# EAGLE board mod69 (EAGLE 9.6.1)
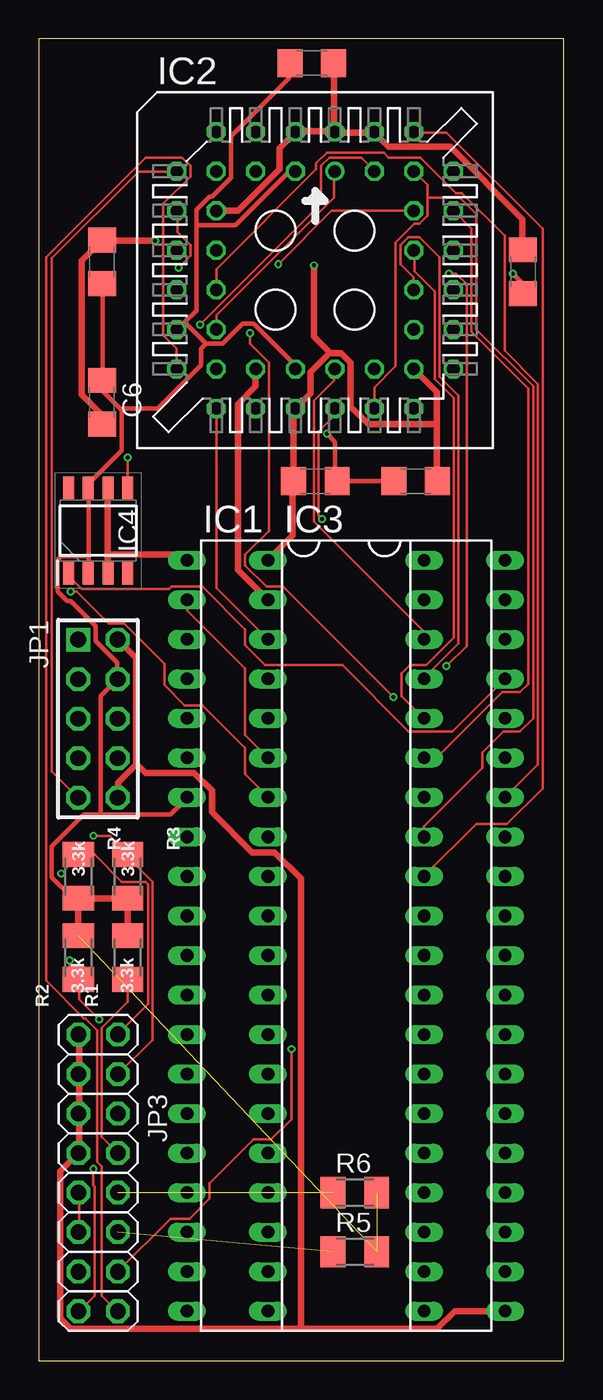
[diagram p0: board, top side]
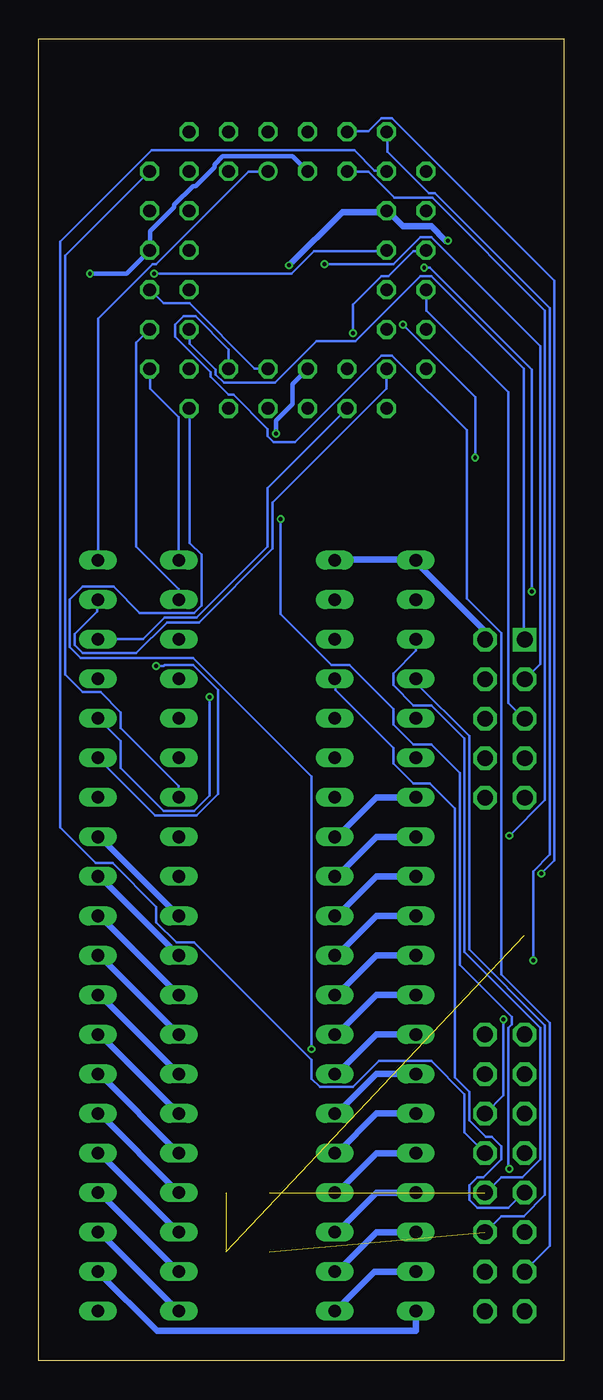
[diagram p1: board, bottom side, seen from below]

Size 33.76 x 84.94 mm. Coordinates in mm from the lower left corner, seen from the top.
Outline: 0,0 33.76,0 33.76,84.94 0,84.94 0,0
Copper layers (1*16): Top 0.035559375mm / dielectric 1.6mm / Bottom 0.035559375mm
Design rules "oshpark-2layer": minimum track width 6mil, minimum drill 10mil, track to track 6mil, track to pad 6mil, pad to pad 6mil, via to via 6mil, smd to smd 6mil, copper to edge 15mil, drill to drill 6mil, minimum pad ring 5mil, minimum via ring 5mil, stop-mask expansion 2.5mil, vias tented up to drill 0mil, thermal gap 10mil
Net classes: 0 default: width 0.152 mm, clearance 0.152 mm; 1 PWR: width 0.305 mm, clearance 0.152 mm; 2 GND: width 0.406 mm, clearance 0.152 mm

## Footprints (pad centres in the part's own frame; a part is rotated, then mirrored left to right if it is on the bottom)
C1206 = smd 1.6 x 1.8: 1 -1.4,0; 2 1.4,0
DIL40 = drill 0.813 long: 1 -24.13,-7.62; 2 -21.59,-7.62; 3 -19.05,-7.62; 4 -16.51,-7.62; 5 -13.97,-7.62; 6 -11.43,-7.62; 7 -8.89,-7.62; 8 -6.35,-7.62; 9 -3.81,-7.62; 10 -1.27,-7.62; 11 1.27,-7.62; 12 3.81,-7.62; 13 6.35,-7.62; 14 8.89,-7.62; 15 11.43,-7.62; 16 13.97,-7.62; 17 16.51,-7.62; 18 19.05,-7.62; 19 21.59,-7.62; 20 24.13,-7.62; 21 24.13,7.62; 22 21.59,7.62; 23 19.05,7.62; 24 16.51,7.62; 25 13.97,7.62; 26 11.43,7.62; 27 8.89,7.62; 28 6.35,7.62; 29 3.81,7.62; 30 1.27,7.62; 31 -1.27,7.62; 32 -3.81,7.62; 33 -6.35,7.62; 34 -8.89,7.62; 35 -11.43,7.62; 36 -13.97,7.62; 37 -16.51,7.62; 38 -19.05,7.62; 39 -21.59,7.62; 40 -24.13,7.62
PLCC-S44 = drill 0.813: 1 1.27,6.35 | drill 0.813 octagon: 2 -1.27,8.89; 3 -1.27,6.35; 4 -3.81,8.89; 5 -3.81,6.35; 6 -6.35,8.89; 7 -8.89,6.35; 8 -6.35,6.35; 9 -8.89,3.81; 10 -6.35,3.81; 11 -8.89,1.27; 12 -6.35,1.27; 13 -8.89,-1.27; 14 -6.35,-1.27; 15 -8.89,-3.81; 16 -6.35,-3.81; 17 -8.89,-6.35; 18 -6.35,-8.89; 19 -6.35,-6.35; 20 -3.81,-8.89; 21 -3.81,-6.35; 22 -1.27,-8.89; 23 -1.27,-6.35; 24 1.27,-8.89; 25 1.27,-6.35; 26 3.81,-8.89; 27 3.81,-6.35; 28 6.35,-8.89; 29 8.89,-6.35; 30 6.35,-6.35; 31 8.89,-3.81; 32 6.35,-3.81; 33 8.89,-1.27; 34 6.35,-1.27; 35 8.89,1.27; 36 6.35,1.27; 37 8.89,3.81; 38 6.35,3.81; 39 8.89,6.35; 40 6.35,8.89; 41 6.35,6.35; 42 3.81,8.89; 43 3.81,6.35; 44 1.27,8.89
SOIC127P600X175-8N = smd 1.525 x 0.7: 1 -2.712,1.905; 2 -2.712,0.635; 3 -2.712,-0.635; 4 -2.712,-1.905; 5 2.712,-1.905; 6 2.712,-0.635; 7 2.712,0.635; 8 2.712,1.905
ALTERA-JTAG-10 = drill 1.016 square: 1 -5.08,-1.27 | drill 1.016 octagon: 2 -5.08,1.27; 3 -2.54,-1.27; 4 -2.54,1.27; 5 0,-1.27; 6 0,1.27; 7 2.54,-1.27; 8 2.54,1.27; 9 5.08,-1.27; 10 5.08,1.27
2X08 = drill 1.016 octagon: 1 -8.89,-1.27; 2 -8.89,1.27; 3 -6.35,-1.27; 4 -6.35,1.27; 5 -3.81,-1.27; 6 -3.81,1.27; 7 -1.27,-1.27; 8 -1.27,1.27; 9 1.27,-1.27; 10 1.27,1.27; 11 3.81,-1.27; 12 3.81,1.27; 13 6.35,-1.27; 14 6.35,1.27; 15 8.89,-1.27; 16 8.89,1.27
M1206 = smd 1.6 x 2: 1 -1.4,0; 2 1.4,0

## Placement (x,y rotation side)
C1  0.1µf  [C1206]  4.06,70.61 90 top
C2  0.1µf  [C1206]  31.12,69.98 90 top
C3  0.1µf  [C1206]  17.78,56.52 180 top
C4  0.1µf  [C1206]  17.55,83.39 0 top
C5  0.1µf  [C1206]  24.23,56.52 0 top
C6  0.1µf  [C1206]  4.06,61.59 270 top
IC1  [DIL40]  17.15,27.3 270 top
IC2  EPM7064S44  [PLCC-S44]  17.75,70.08 0 top
IC3  [DIL40]  22.35,27.3 270 top
IC4  NB3N502DG  [SOIC127P600X175-8N]  3.81,53.34 90 top
JP1  ALTERA-JTAG-10  [ALTERA-JTAG-10]  3.8,41.25 270 top
JP3  [2X08]  3.81,12.06 270 top
R1  3.3k  [M1206]  5.71,25.91 90 top
R2  3.3k  [M1206]  2.54,25.91 90 top
R3  3.3k  [M1206]  5.71,31.12 270 top
R4  3.3k  [M1206]  2.54,31.12 270 top
R5  10k  [M1206]  20.32,6.99 0 top
R6  10k  [M1206]  20.32,10.79 0 top

## Library data of the parts
C1-C6 = rcl; SPICEPREFIX: C
IC1 = micro-motorola; MF: NTE ELECTRONICS; MPN: NTE6809E; OC_FARNELL: unknown; OC_NEWARK: 31C5318
IC2 = altera; MPN: EPM7064SLC44-10N; OC_FARNELL: 1549449; OC_NEWARK: 51R0526
IC3 = ic-package
IC4 = custom-chips; ALLIED_NUMBER: 70347799; ALLIED_PRICE-STOCK: http://www.alliedelec.com/on-semiconductor-nb3n502dg/70347799/; HEIGHT: 1.75mm; MANUFACTURER_NAME: ON Semiconductor; MANUFACTURER_PART_NUMBER: NB3N502DG; MOUSER_PART_NUMBER: 863-NB3N502DG; MOUSER_PRICE-STOCK: https://www.mouser.com/Search/Refine.aspx?Keyword=863-NB3N502DG; RS_PART_NUMBER: 7876920P; RS_PRICE-STOCK: http://uk.rs-online.com/web/p/products/7876920P
JP1 = custom-chips
JP3 = pinhead
R1-R6 = rcl; SPICEPREFIX: R

## Nets
5IRQ: IC3.4 JP3.9 JP3.11
5PHI0: IC3.37 IC4.1
5PHI1: IC2.18 IC3.3
5PHI2: IC2.19 IC3.39
5RDY [GND]: IC2.21 IC3.2
5RES: IC2.1 IC2.16 IC3.40
5RW: IC2.14 IC3.34
5SO: IC2.20 IC3.38
5SYNC: IC2.9 IC3.7
9AVMA: IC1.36 IC2.36
9BUSY: IC1.33 IC2.26 IC2.41
9E: IC1.34 IC2.39
9FIRQ: IC1.4 JP3.12 R5.1
9HALT: IC1.40 IC2.29
9IRQ: IC1.3 JP3.10 R6.1
9LIC: IC1.38 IC2.25 IC2.33
9NMI: IC1.2 IC3.6
9Q: IC1.35 IC2.37
9RESET: IC1.37 IC2.34
9RW: IC1.32 IC2.40
9TSC: IC1.39 IC2.31
A0: IC1.8 IC3.9
A1: IC1.9 IC3.10
A2: IC1.10 IC3.11
A3: IC1.11 IC3.12
A4: IC1.12 IC3.13
A5: IC1.13 IC3.14
A6: IC1.14 IC3.15
A7: IC1.15 IC3.16
A8: IC1.16 IC3.17
A9: IC1.17 IC3.18
A10: IC1.18 IC3.19
A11: IC1.19 IC3.20
A12: IC1.20 IC3.22
A13: IC1.21 IC3.23
A14: IC1.22 IC3.24
A15: IC1.23 IC3.25
C0: IC2.8 JP3.8 R1.1
C1: IC2.6 JP3.6 R2.1
C2: IC2.5 JP3.4 R3.1
C3: IC2.4 JP3.2 R4.1
CLOCK: IC2.43 IC4.5
D0: IC1.31 IC3.33
D1: IC1.30 IC3.32
D2: IC1.29 IC3.31
D3: IC1.28 IC3.30
D4: IC1.27 IC3.29
D5: IC1.26 IC3.28
D6: IC1.25 IC3.27
D7: IC1.24 IC3.26
GND [GND]: C1.2 C2.2 C3.2 C4.2 C5.2 C6.2 IC1.1 IC2.2 IC2.10 IC2.22 IC2.30 IC2.42 IC2.44 IC3.1 IC3.21 IC4.3 IC4.6 JP1.2 JP1.10 JP3.1 JP3.3 JP3.5 JP3.7
N$1: IC2.27 JP3.13
N$2: IC2.28 JP3.14
N$3: IC2.24 JP3.15
N$4: IC2.17 JP3.16
SHLT: IC2.12 IC3.35
SRW: IC2.11 IC3.36
TCK: IC2.32 JP1.1
TDI: IC2.7 JP1.9
TDO: IC2.38 JP1.3
TMS: IC2.13 JP1.5
VCC [PWR]: C1.1 C2.1 C3.1 C4.1 C5.1 C6.1 IC1.7 IC2.3 IC2.15 IC2.23 IC2.35 IC3.8 IC4.2 IC4.7 JP1.4 R1.2 R2.2 R3.2 R4.2 R5.2 R6.2

## Tracks (layer width: path | path; a pad name or v marks a point on that pad's centre or on a via)
5IRQ
  Top 0.152: JP3.11 2.59,8.28 2.59,10.79 JP3.9
  Bottom 0.152: IC3.4 14.71,43.79 14.71,43.1 10.97,39.37 10.97,38.38 9.68,37.08 8.61,37.08 7.01,35.48 7.01,18.19 6.1,17.27 6.1,15.44 5.03,14.38 4.65,14.38 4.04,13.77 4.04,12.93 5.18,11.79 5.56,11.79 6.1,11.25 6.1,10.34 5.56,9.8 3.58,9.8 2.59,10.79 JP3.9
5PHI0
  Top 0.152: IC4.1 1.9,50.42 2.74,49.58 8.38,49.58 8.53,49.73 10.52,49.73 13.26,46.99 13.26,46 14.55,44.7 19.51,44.7 23.77,40.44 26.59,40.44 IC3.37
5PHI1
  Top 0.152: IC3.3 11.43,49.66 11.43,61.16 IC2.18
5PHI2
  Bottom 0.152: IC3.39 30.02,48.9 30.02,48.13 31.47,46.69 31.47,46 30.94,45.47 27.51,45.47 25.53,47.45 23.47,47.45 18.74,52.17 18.74,55.14 11.43,62.46 11.43,63.68 IC2.19
5RDY
  Top 0.406: IC2.21 13.94,62.61 12.8,61.47 12.8,50.8 14.71,48.9 IC3.2
5RES
  Top 0.152: IC2.16 11.43,66.27 11.43,67.18 18.97,74.73 18.97,76.4 IC2.1
  Bottom 0.152: IC3.40 29.95,51.49 29.95,66.95 26.44,70.46 26.21,70.46 20.27,76.4 19.05,76.4 IC2.1
5RW
  Top 0.152: IC3.34 32.08,38.3 32.08,62.76 29.95,64.9 29.95,72.29 27.2,75.03 26.82,75.03 24.54,77.32 22.48,77.32 22.17,77.62 18.52,77.62 17.83,76.94 17.83,76.56 11.43,70.16 11.43,68.86 IC2.14
5SO
  Bottom 0.152: IC3.38 29.95,46.38 27.05,46.38 25.68,47.75 23.62,47.75 19.05,52.32 19.05,56.06 13.94,61.16 IC2.20
5SYNC  (via drill 0.25)
  Top 0.152: v8.99,70.23 9.75,70.99 9.75,71.68 8.92,72.52 8.92,73.89 IC2.9 | v2.06,49.43 2.44,49.43 4.5,47.37 5.49,47.37 8.08,44.78 8.08,43.41 9.37,42.11 10.52,42.11 13.26,39.37 13.26,37.69 14.71,36.25 IC3.7
  Bottom 0.152: v8.99,70.23 8.61,70.23 2.06,63.68 v2.06,49.43
9AVMA
  Top 0.152: IC1.36 23.32,42.72 23.32,44.17 23.85,44.7 24.92,44.7 26.67,46.46 26.67,61.85 25.45,63.07 25.45,68.71 24.16,70 24.16,71.3 IC2.36
9BUSY
  Top 0.152: IC2.26 21.56,62.53 22.94,63.91 22.94,71.83 24.16,73.05 24.46,73.05 24.99,73.58 24.99,74.73 | 24.99,74.73 24.99,75.56 24.16,76.4 IC2.41 | IC1.33 24.77,34.34 28.5,38.08 28.5,39.07 29.87,40.44 30.94,40.44 31.77,41.28 31.77,62.61 28.12,66.27 28.12,73.66 27.05,74.73 24.99,74.73
9E
  Bottom 0.152: IC1.34 24.77,36.93 28.5,40.66 28.5,41.66 29.79,42.95 30.94,42.95 32.08,44.09 32.08,70.99 IC2.39
9FIRQ  (1 unrouted)
  Bottom 0.152: IC1.4 9.53,43.56 6.1,40.13 6.1,26.42 1.22,21.54 1.22,10.64 2.59,9.27 4.04,9.27 5.03,8.28 JP3.12
9HALT
  Bottom 0.152: IC1.40 24.77,60.63 26.59,62.46 26.59,63.68 IC2.29
9IRQ  (1 unrouted)
  Bottom 0.152: IC1.3 9.53,45.62 10.97,44.17 10.97,43.41 9.68,42.11 8.53,42.11 6.4,39.98 6.4,26.26 1.52,21.39 1.52,12.93 2.67,11.79 4.04,11.79 5.03,10.79 JP3.10
9LIC
  Top 0.152: IC1.38 24.77,46.84 17.68,53.92 17.68,61.7 18.97,62.99 18.97,63.68 IC2.25
  Bottom 0.152: IC2.25 19.05,63.75 19.89,63.75 24.08,67.95 25.76,67.95 26.59,68.78 IC2.33
9NMI
  Top 0.152: IC1.2 9.53,48.21 13.26,44.48 13.26,40.21 IC3.6
9Q
  Top 0.152: IC1.35 24.77,38.76 25.6,38.76 29.79,42.95 30.94,42.95 31.47,43.48 31.47,62.46 27.81,66.12 27.81,72.75 26.67,73.89 IC2.37
9RESET
  Top 0.152: IC2.34 24.08,68.86 24.08,69.62 23.24,70.46 23.24,71.68 23.77,72.21 24.46,72.21 25.76,70.92 25.76,63.22 26.98,62 26.98,46.08 24.77,43.87 IC1.37
9RW
  Top 0.152: IC2.40 24.16,78.92 26.21,78.92 32.38,72.75 32.38,36.78 30.1,34.49 28.12,34.49 24.77,31.14 IC1.32
9TSC
  Bottom 0.152: IC1.39 24.77,49.58 27.51,52.32 27.51,65.43 26.67,66.27 IC2.31
A0
  Bottom 0.406: IC3.9 14.6,31.12 12.06,33.66 IC1.8
A1
  Bottom 0.406: IC3.10 14.6,28.58 12.06,31.12 IC1.9
A2
  Bottom 0.406: IC3.11 14.6,26.04 12.06,28.58 IC1.10
A3
  Bottom 0.406: IC3.12 14.6,23.5 12.06,26.04 IC1.11
A4
  Bottom 0.406: IC3.13 14.6,20.96 12.06,23.5 IC1.12
A5
  Bottom 0.406: IC3.14 14.6,18.41 12.06,20.96 IC1.13
A6
  Bottom 0.406: IC3.15 14.6,15.88 12.06,18.41 IC1.14
A7
  Bottom 0.406: IC3.16 14.6,13.33 12.06,15.88 IC1.15
A8
  Bottom 0.406: IC3.17 14.6,10.79 12.06,13.33 IC1.16
A9
  Bottom 0.406: IC3.18 14.6,8.26 12.06,10.79 IC1.17
A10
  Bottom 0.406: IC3.19 14.6,5.72 12.06,8.26 IC1.18
A11
  Bottom 0.406: IC3.20 12.19,5.72 IC1.19
A12
  Bottom 0.406: IC1.20 9.53,1.91 26.16,1.91 IC3.22
A13
  Bottom 0.406: IC1.21 29.84,8.26 IC3.23
A14
  Bottom 0.406: IC1.22 29.84,10.79 IC3.24
A15
  Bottom 0.406: IC1.23 29.84,13.33 IC3.25
C0
  Top 0.152: R1.1 5.71,23.06 4.04,21.39 4.04,14.38 JP3.8
  Bottom 0.152: IC2.8 11.43,76.48 12.19,76.48 13.49,77.78 26.52,77.78 32.38,71.91 32.38,34.27 30.1,31.98 29.03,31.98 26.21,29.16 26.21,28.17 24.92,26.87 23.77,26.87 16.23,19.33 16.23,18.11 15.7,17.58 13.56,17.58 11.89,19.25 8.53,19.25 6.4,17.12 6.4,14.68 5.11,13.39 JP3.8
C1  (via drill 0.25)
  Top 0.152: v3.89,21.92 2.59,23.22 2.59,24.44 R2.1 2.51,24.51 1.98,25.04 v1.98,25.73
  Bottom 0.152: v3.89,21.92 3.89,17.04 5.03,15.9 JP3.6 | v1.98,25.73 1.98,31.45 0.91,32.51 0.91,67.64 8.31,75.03 8.69,75.03 11.35,77.7 11.35,78.92 IC2.6
C2  (via drill 0.25)
  Top 0.152: JP3.4 5.11,18.41 7.31,20.62 7.31,30.76 5.71,32.36 R3.1 5.71,32.59 4.57,33.73 v3.5,33.73
  Bottom 0.152: v3.5,33.73 1.22,36.02 1.22,67.49 8.46,74.73 10.9,74.73 12.57,76.4 13.94,76.4 IC2.5
C3  (via drill 0.25)
  Top 0.152: JP3.2 5.11,21.01 7.01,22.91 7.01,30.61 6.86,30.76 5.33,30.76 3.58,32.51 2.59,32.51 R4.1 2.59,32.44 v1.45,31.29
  Bottom 0.152: v1.45,31.29 0.61,32.13 0.61,69.39 11.05,79.83 11.74,79.83 12.57,78.99 13.94,78.99 IC2.4
CLOCK  (via drill 0.25)
  Top 0.152: v5.71,58.04 IC4.5 | v10.36,66.57 18.14,74.35 18.14,76.78 18.67,77.32 20.73,77.32 21.56,76.48 IC2.43
  Bottom 0.152: v5.71,58.04 5.71,61.92 v10.36,66.57
D0
  Bottom 0.406: IC1.31 29.84,33.66 IC3.33
D1
  Bottom 0.406: IC1.30 29.84,31.12 IC3.32
D2
  Bottom 0.406: IC1.29 29.84,28.58 IC3.31
D3
  Bottom 0.406: IC1.28 29.84,26.04 IC3.30
D4
  Bottom 0.406: IC1.27 29.84,23.5 IC3.29
D5
  Bottom 0.406: IC1.26 29.84,20.96 IC3.28
D6
  Bottom 0.406: IC1.25 29.84,18.41 IC3.27
D7
  Bottom 0.406: IC1.24 29.84,15.88 IC3.26
GND  (via drill 0.25)
  Top 0.406: C2.2 31.09,71.45 31.09,73.36 26.44,78 22.48,78 21.56,78.92 IC2.42 21.41,78.92 19.2,78.92 IC2.44 | C6.2 4.04,60.25 4.04,60.78 2.74,62.08 2.74,70.69 4.04,71.98 C1.2 4.27,71.98 v7.47,71.98 | C4.2 18.97,83.34 18.97,78.99 IC2.44 | IC2.10 12.8,73.89 15.47,76.56 15.47,77.93 16.46,78.92 IC2.2 16.69,78.99 18.82,78.99 IC2.44 | IC3.21 26.75,3.18 25.6,2.03 16.84,2.03 | 16.84,2.03 2.06,2.03 1.37,2.72 1.37,12.17 JP3.7 2.59,13.46 2.59,15.82 JP3.5 2.59,16.05 2.59,18.41 JP3.3 2.59,18.57 2.59,20.93 JP3.1 | 6.25,38.3 5.11,37.16 5.11,36.17 JP1.10 | 6.25,38.3 6.25,45.16 5.11,46.3 JP1.2 | 25.6,60.17 25.6,62.23 IC2.30 | 25.6,60.17 25.6,56.52 C5.2 | 4.42,51.79 4.42,55.98 IC4.6 | 4.42,51.79 4.42,50.65 IC4.3 | 4.42,51.79 9.22,51.79 9.53,51.49 IC1.1 | IC3.1 16.31,53.01 16.31,56.36 C3.2 16.38,61.09 IC2.22 17.45,62.15 17.45,63.53 18.67,64.75 | 25.6,60.17 21.18,60.17 20.04,61.32 20.04,64.14 19.43,64.75 18.67,64.75 | 16.84,2.03 16.84,30.99 15.16,32.66 13.72,32.66 11.12,35.26 11.12,36.63 9.98,37.77 6.86,37.77 6.4,38.23 6.25,38.3 | v17.68,70.38 17.68,65.81 18.59,64.9 18.67,64.75
  Bottom 0.406: v7.47,71.98 7.62,71.98 8.53,72.9 10.36,72.9 11.35,73.89 IC2.10 11.58,73.81 14.25,73.81 v17.68,70.38 | IC3.1 14.71,51.49 9.53,51.49 IC1.1 9.45,51.26 5.11,46.91 5.11,46.38 JP1.2
N$1
  Bottom 0.152: IC2.27 21.56,64.97 23.7,67.11 24.46,67.11 24.99,66.57 24.99,65.81 22.71,63.53 22.71,63.22 21.56,62.08 21.26,62.08 19.05,59.87 19.05,59.41 18.67,59.03 17.3,59.03 11.74,64.59 11.05,64.59 6.25,59.79 6.25,48.97 4.04,46.76 4.04,24.82 0.91,21.69 0.91,7.37 2.51,5.77 JP3.13
N$2  (via drill 0.25)
  Top 0.152: v16.23,20.02 16.23,15.52 14.94,14.22 13.79,14.22 10.97,11.4 10.97,10.41 9.68,9.12 8.46,9.12 5.11,5.77 JP3.14
  Bottom 0.152: v16.23,20.02 16.23,37.54 23.85,45.16 31.09,45.16 31.77,45.85 31.77,48.9 30.94,49.73 28.96,49.73 27.28,48.06 23.77,48.06 23.32,48.51 23.32,51.79 24.08,52.55 24.08,61.16 IC2.28
N$3  (via drill 0.25)
  Top 0.152: v18.21,54.08 17.98,54.31 17.98,59.72 18.97,60.71 18.97,61.16 IC2.24 | v3.5,12.32 3.5,11.25 3.58,11.18 3.58,4.17 2.59,3.18 JP3.15
  Bottom 0.152: v18.21,54.08 18.21,47.98 14.94,44.7 13.79,44.7 10.97,41.89 10.97,40.89 9.68,39.6 8.53,39.6 6.71,37.77 6.71,25.43 3.35,22.07 3.35,21.62 3.58,21.39 3.58,12.4 v3.5,12.32
N$4
  Top 0.152: IC2.17 8.84,63.75 8.84,65.05 8,65.89 8,74.35 9.75,76.1 9.75,76.78 9.22,77.32 6.86,77.32 0.46,70.92 0.46,24.44 2.9,22 2.97,22 3.73,21.23 3.73,12.78 4.04,12.47 4.04,4.17 5.03,3.18 JP3.16
SHLT  (via drill 0.25)
  Top 0.152: v26.37,69.85 26.82,69.85 27.51,69.16 27.51,45.92 v26.21,44.63
  Bottom 0.152: v26.37,69.85 17.53,69.85 16.08,71.3 11.43,71.3 IC2.12 | v26.21,44.63 25.76,44.63 25.68,44.7 23.85,44.7 22.25,43.1 22.25,36.4 23.62,35.03 26.29,35.03 29.95,38.68 IC3.35
SRW  (via drill 0.25)
  Top 0.152: v13.56,66.04 13.56,65.35 14.78,64.14 14.78,53.31 13.26,51.79 13.26,51.11 14.63,49.73 15.7,49.73 v22.78,42.65
  Bottom 0.152: v13.56,66.04 13.56,67.87 11.74,69.7 11.28,69.7 9.68,71.3 8.92,71.3 IC2.11 | v22.78,42.65 22.78,36.32 23.77,35.33 25.76,35.33 28.5,38.08 28.5,39.83 29.95,41.28 IC3.36
TCK
  Bottom 0.152: IC2.32 24.08,66.27 24.08,65.35 22.4,63.68 22.4,63.37 21.87,62.84 18.59,62.84 15.93,65.51 13.41,65.51 9.22,69.7 8.53,69.7 2.59,63.75 2.59,46.38 JP1.1
TDI
  Top 0.152: IC2.7 8.84,76.4 6.4,76.4 0.84,70.84 0.84,37.85 JP1.9
TDO  (via drill 0.25)
  Top 0.152: IC2.38 18.82,73.89 v15.39,70.46
  Bottom 0.152: v15.39,70.46 10.97,70.46 9.22,72.21 8.53,72.21 1.52,65.2 1.52,44.78 JP1.3
TMS
  Bottom 0.152: IC2.13 8.84,68.78 8.84,67.49 3.58,62.23 3.58,42.27 2.59,41.28 JP1.5
VCC  (via drill 0.25)  (2 unrouted)
  Top 0.305: 3.96,35.1 8.46,35.1 9.53,36.17 IC1.7 | 3.96,35.1 2.9,35.1 0.84,33.05 0.84,31.06 2.13,29.77 2.36,29.77 R4.2 | C1.1 4.12,69.16 4.12,63.07 C6.1 4.04,62.84 4.04,62.38 5.33,61.09 | 3.2,51.71 3.2,55.98 IC4.7 3.28,56.13 3.28,56.44 5.33,58.5 5.33,61.09 | 3.2,51.71 3.2,50.65 IC4.2 | 3.2,51.71 1.45,51.71 1.22,51.49 1.22,49.43 1.83,48.82 2.06,48.82 3.66,47.22 3.66,46.23 5.03,44.86 5.03,43.79 JP1.4 4.95,43.71 3.96,42.72 3.96,35.1 | v30.48,69.85 31.09,69.24 31.09,68.63 C2.1 | C5.1 C3.1 19.05,56.59 19.05,59.03 v18.52,59.56 | 10.13,72.97 10.13,67.49 9.37,66.73 | 10.13,72.97 10.13,73.97 10.97,74.8 11.12,74.8 12.34,76.02 12.34,78.69 16.08,82.42 16.08,83.34 C4.1 | 9.37,66.73 8.92,66.27 IC2.15 | 10.74,65.35 11.81,65.35 13.11,66.65 13.79,66.65 16.46,63.98 16.46,63.75 IC2.23 | 9.37,66.73 10.74,65.35 | 10.13,72.97 12.65,72.97 16.08,76.4 16.46,76.4 IC2.3 | 10.74,65.35 10.44,65.05 10.44,63.98 7.62,61.16 5.41,61.16 5.33,61.09
  Top 0.406: R2.2 R4.2 R3.2 R1.2
  Bottom 0.305: v30.48,69.85 28.12,69.85 26.67,71.3 IC2.35 26.59,71.45 26.59,72.59 25.07,74.12 25.07,74.27 23.85,75.49 23.7,75.49 22.48,76.71 22.48,76.86 21.95,77.39 17.45,77.39 IC2.3 | v18.52,59.56 18.52,60.4 17.45,61.47 17.45,62.76 IC2.23
  Bottom 0.406: IC3.8 14.6,33.66 12.06,36.2 IC1.7